# Altium PCB BMW Front-Centet Driver-Passenger Light.PcbDoc
Units mm, origin at the board's own origin, x right, y up, seen from the top; angles counter-clockwise.
Board outline 152.4 x 101.6 mm, 2 copper layers (Top Layer, Bottom Layer); 80 components, 62 nets, 160 pads, 0 vias.
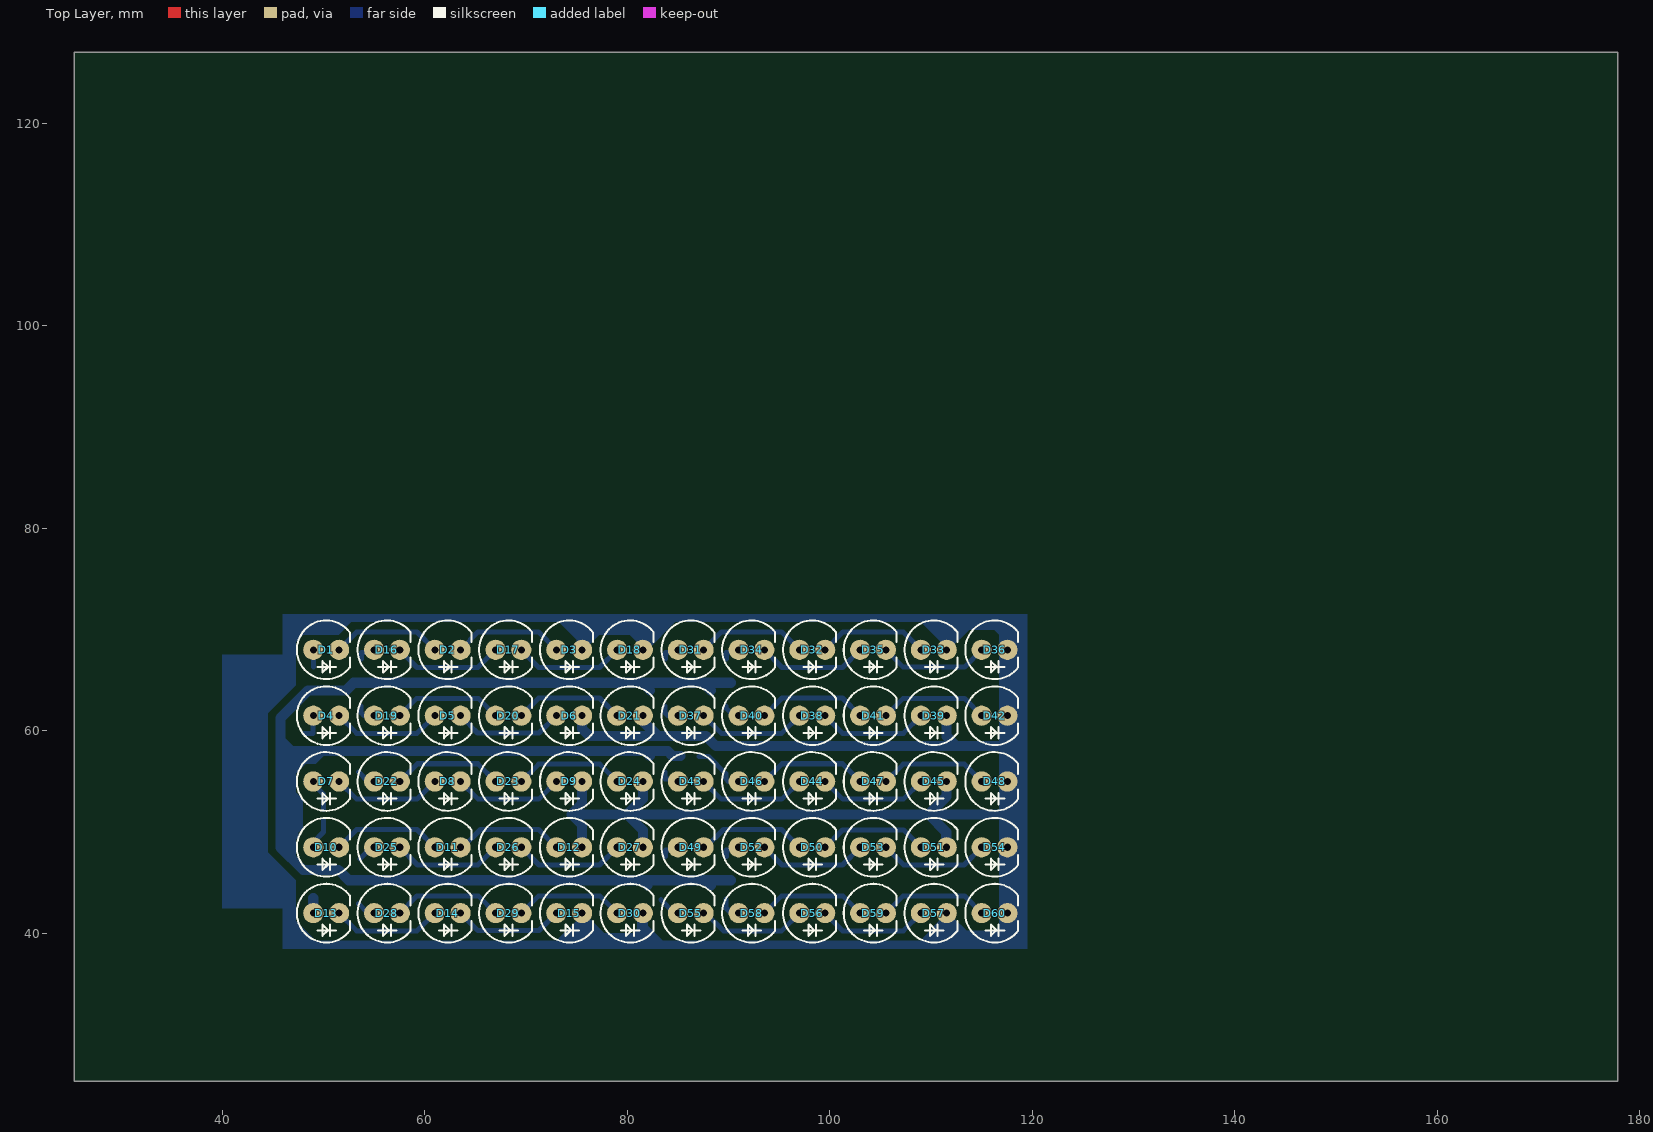
[diagram p0: Top Layer view]
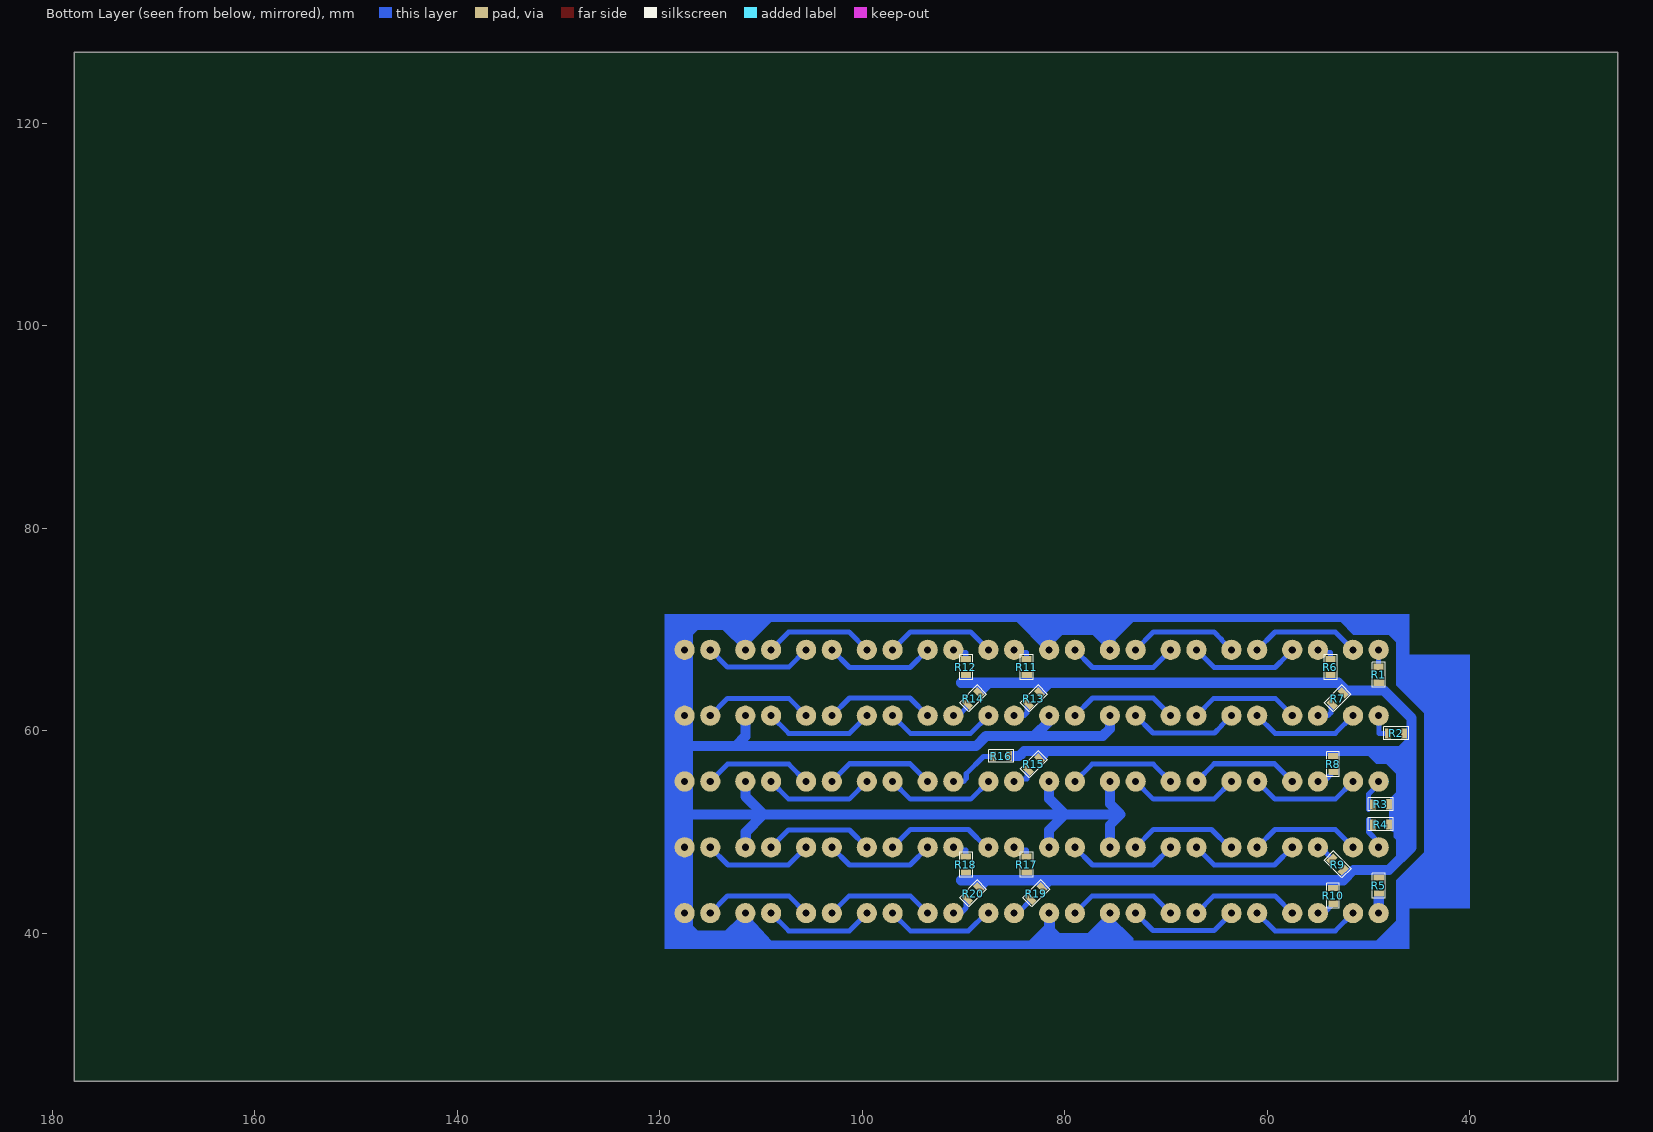
[diagram p1: Bottom Layer view, seen from below]
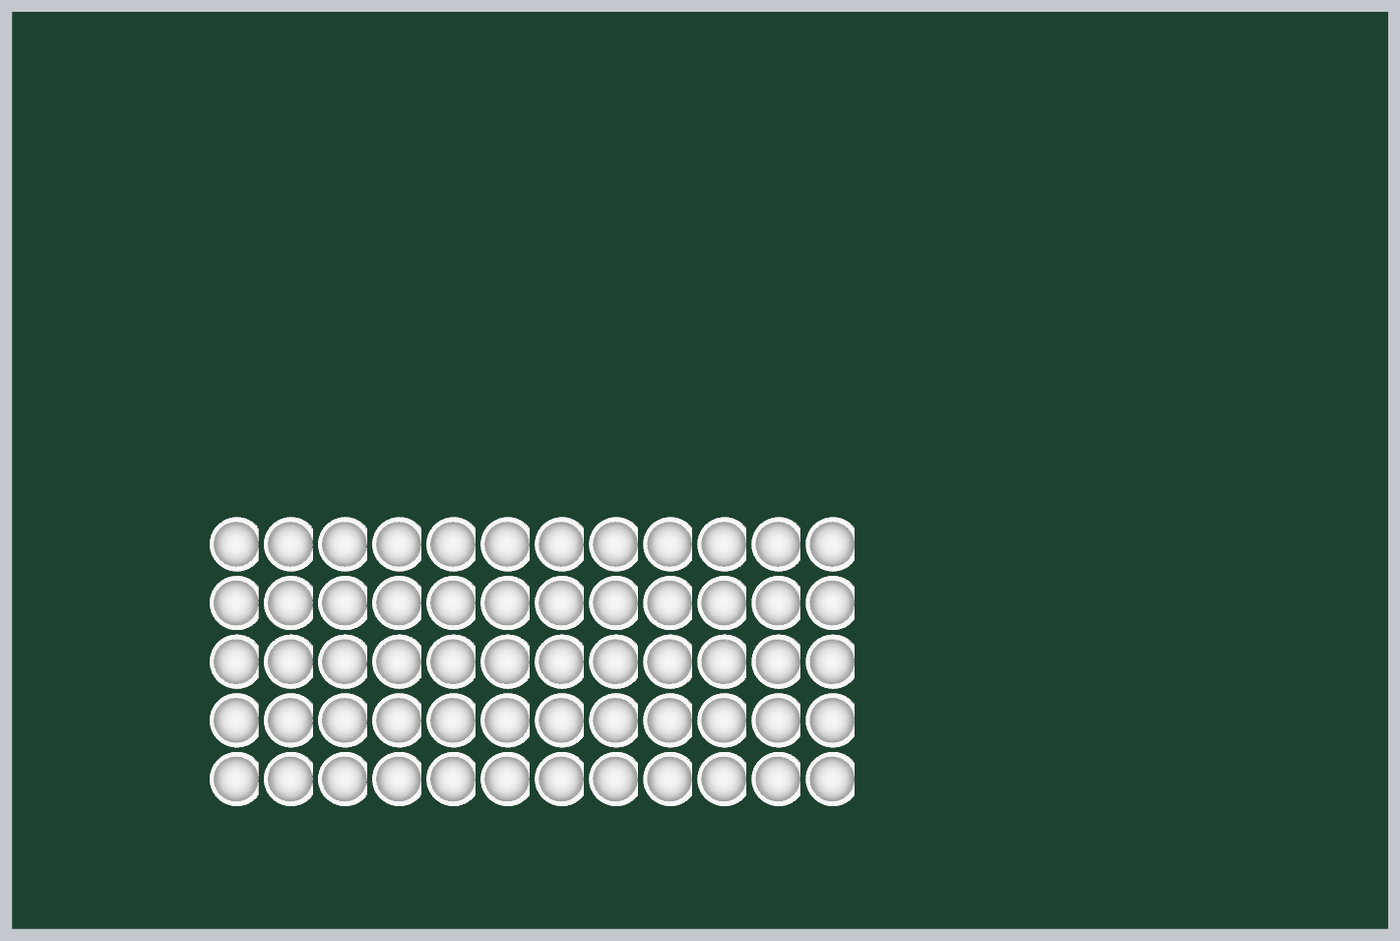
[diagram p2: 3D render of the assembled board from above, using the file's embedded part models]
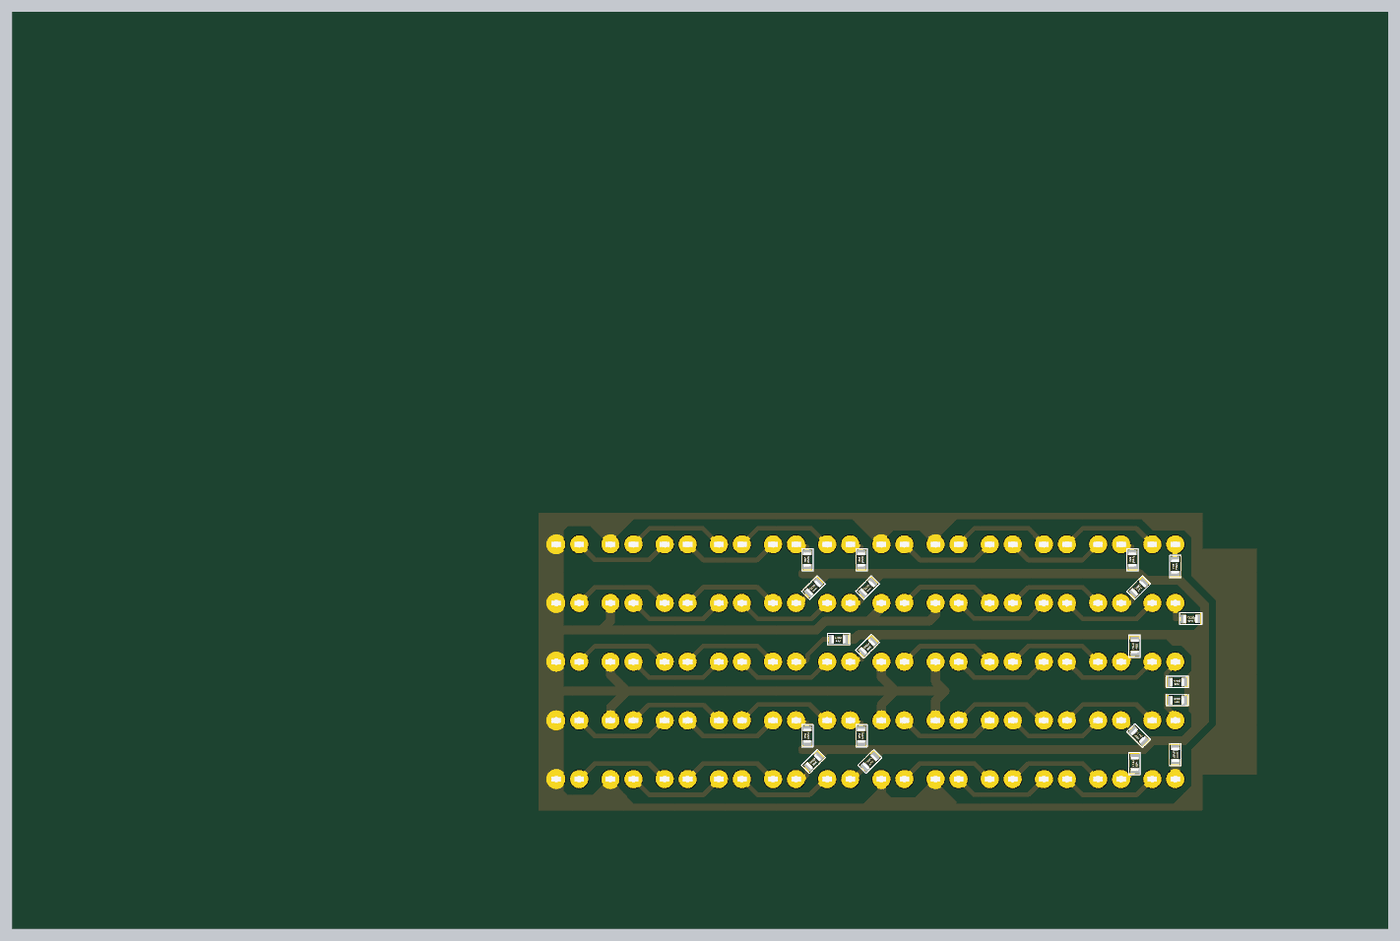
[diagram p3: 3D render of the assembled board from below, using the file's embedded part models]

## Layer stack, top to bottom
Top Solder: solder mask 0.0102, Solder Resist, Dk 3.5
Top Layer: signal copper 0.0356
Dielectric 1: dielectric 0.32, FR-4, Dk 4.8
Bottom Layer: signal copper 0.0356
Bottom Solder: solder mask 0.0102, Solder Resist, Dk 3.5

## Board outline
25.4,25.4 177.8,25.4 177.8,127 25.4,127

## Design rules (kind name [scope] priority, off if disabled: settings)
Clearance [All] p1: gap=0.254
PolygonConnect [All] p1: connectstyle=Relief reliefconductorwidth=0.254 reliefentries=4 polygonreliefangle="90 Angle" airgapwidth=0.254
RoutingVias [All] p1: holewidth=0.711 width=1.27 viastyle="Through Hole" minholewidth=0.711 minwidth=1.27 maxholewidth=0.711 maxwidth=1.27
SolderMaskExpansion [All] p1: expansion=0.102
Width [All] p1: maxlimit=1 minlimit=0.5 preferedwidth=1 minimp=50.000000 maximp=50.000000 favimp=50.000000
29 further rules are at their usual default settings.

## Components (designator, comment, footprint, x,y, rotation, side; value= is the part's Value field where it differs from the comment)
D1 "White" "LED Round 5mm White" 49,68 r0 top
D2 "White" "LED Round 5mm White" 61,68 r0 top
D3 "White" "LED Round 5mm White" 73,68 r0 top
D4 "White" "LED Round 5mm White" 49,61.5 r0 top
D5 "White" "LED Round 5mm White" 61,61.5 r0 top
D6 "White" "LED Round 5mm White" 73,61.5 r0 top
D7 "White" "LED Round 5mm White" 49,55 r0 top
D8 "White" "LED Round 5mm White" 61,55 r0 top
D9 "White" "LED Round 5mm White" 73,55 r0 top
D10 "White" "LED Round 5mm White" 49,48.5 r0 top
D11 "White" "LED Round 5mm White" 61,48.5 r0 top
D12 "White" "LED Round 5mm White" 73,48.5 r0 top
D13 "White" "LED Round 5mm White" 49,42 r0 top
D14 "White" "LED Round 5mm White" 61,42 r0 top
D15 "White" "LED Round 5mm White" 73,42 r0 top
D16 "White" "LED Round 5mm White" 55,68 r0 top
D17 "White" "LED Round 5mm White" 67,68 r0 top
D18 "White" "LED Round 5mm White" 79,68 r0 top
D19 "White" "LED Round 5mm White" 55,61.5 r0 top
D20 "White" "LED Round 5mm White" 67,61.5 r0 top
D21 "White" "LED Round 5mm White" 79,61.5 r0 top
D22 "White" "LED Round 5mm White" 55,55 r0 top
D23 "White" "LED Round 5mm White" 67,55 r0 top
D24 "White" "LED Round 5mm White" 79,55 r0 top
D25 "White" "LED Round 5mm White" 55,48.5 r0 top
D26 "White" "LED Round 5mm White" 67,48.5 r0 top
D27 "White" "LED Round 5mm White" 79,48.5 r0 top
D28 "White" "LED Round 5mm White" 55,42 r0 top
D29 "White" "LED Round 5mm White" 67,42 r0 top
D30 "White" "LED Round 5mm White" 79,42 r0 top
D31 "White" "LED Round 5mm White" 85,68 r0 top
D32 "White" "LED Round 5mm White" 97,68 r0 top
D33 "White" "LED Round 5mm White" 109,68 r0 top
D34 "White" "LED Round 5mm White" 91,68 r0 top
D35 "White" "LED Round 5mm White" 103,68 r0 top
D36 "White" "LED Round 5mm White" 115,68 r0 top
D37 "White" "LED Round 5mm White" 85,61.5 r0 top
D38 "White" "LED Round 5mm White" 97,61.5 r0 top
D39 "White" "LED Round 5mm White" 109,61.5 r0 top
D40 "White" "LED Round 5mm White" 91,61.5 r0 top
D41 "White" "LED Round 5mm White" 103,61.5 r0 top
D42 "White" "LED Round 5mm White" 115,61.5 r0 top
D43 "White" "LED Round 5mm White" 85,55 r0 top
D44 "White" "LED Round 5mm White" 97,55 r0 top
D45 "White" "LED Round 5mm White" 109,55 r0 top
D46 "White" "LED Round 5mm White" 91,55 r0 top
D47 "White" "LED Round 5mm White" 103,55 r0 top
D48 "White" "LED Round 5mm White" 115,55 r0 top
D49 "White" "LED Round 5mm White" 85,48.5 r0 top
D50 "White" "LED Round 5mm White" 97,48.5 r0 top
D51 "White" "LED Round 5mm White" 109,48.5 r0 top
D52 "White" "LED Round 5mm White" 91,48.5 r0 top
D53 "White" "LED Round 5mm White" 103,48.5 r0 top
D54 "White" "LED Round 5mm White" 115,48.5 r0 top
D55 "White" "LED Round 5mm White" 85,42 r0 top
D56 "White" "LED Round 5mm White" 97,42 r0 top
D57 "White" "LED Round 5mm White" 109,42 r0 top
D58 "White" "LED Round 5mm White" 91,42 r0 top
D59 "White" "LED Round 5mm White" 103,42 r0 top
D60 "White" "LED Round 5mm White" 115,42 r0 top
R1 "0 КOm" "SMD 0603 (1608)" 49,64.75 r90 bottom
R2 "0 КOm" "SMD 0603 (1608)" 46.5,59.75 r0 bottom
R3 "0 КOm" "SMD 0603 (1608)" 48,52.75 r0 bottom
R4 "0 КOm" "SMD 0603 (1608)" 48,50.75 r0 bottom
R5 "0 КOm" "SMD 0603 (1608)" 49,45.5 r270 bottom
R6 "0 КOm" "SMD 0603 (1608)" 53.75,65.5 r90 bottom
R7 "0 КOm" "SMD 0603 (1608)" 52.5,63.75 r315 bottom
R8 "0 КOm" "SMD 0603 (1608)" 53.5,57.5 r270 bottom
R9 "0 КOm" "SMD 0603 (1608)" 52.5,46.25 r45 bottom
R10 "0 КOm" "SMD 0603 (1608)" 53.5,44.5 r270 bottom
R11 "0 КOm" "SMD 0603 (1608)" 83.75,65.5 r90 bottom
R12 "0 КOm" "SMD 0603 (1608)" 89.75,65.5 r90 bottom
R13 "0 КOm" "SMD 0603 (1608)" 82.5,63.75 r315 bottom
R14 "0 КOm" "SMD 0603 (1608)" 88.5,63.75 r315 bottom
R15 "0 КOm" "SMD 0603 (1608)" 82.5,57.25 r315 bottom
R16 "0 КOm" "SMD 0603 (1608)" 85.5,57.5 r0 bottom
R17 "0 КOm" "SMD 0603 (1608)" 83.75,46 r90 bottom
R18 "0 КOm" "SMD 0603 (1608)" 89.75,46 r90 bottom
R19 "0 КOm" "SMD 0603 (1608)" 82.25,44.5 r315 bottom
R20 "0 КOm" "SMD 0603 (1608)" 88.5,44.5 r315 bottom

## Footprints (in the part's own frame and the unit in brackets; to place one, negate y for a bottom-side part, rotate by r counter-clockwise, add the part's x,y. Pads: shape width x height; smd on the part's side, far side on the other; paste and mask are expansions set on the pad)
"LED Round 5mm White" [mm]
  round 2 hole 0.7: A(0,0) K(2.54,0)
  silkscreen extent -1.62,-2.9 3.6,2.9, body extent -1.71,-3.01 3.71,3.01, height 9.31
"SMD 0603 (1608)" [mm]
  rect 0.6x1 smd: 1(0,0) 2(1.575,0.025)
  silkscreen extent -0.45,-0.65 2.02,0.63, body extent 0.03,-0.4 1.58,0.45, height 0.45

## Part data
D1 D2 D3 D4 D5 D6 D7 D8 D9 D10 D11 D12 D13 D14 D15 D16 D17 D18 D19 D20 D21 D22 D23 D24 D25 D26 D27 D28 D29 D30 D31 D32 D33 D34 D35 D36 D37 D38 D39 D40 D41 D42 D43 D44 D45 D46 D47 D48 D49 D50 D51 D52 D53 D54 D55 D56 D57 D58 D59 D60: library part "Led Round 5mm White", "3.2-3.4v 25mA, 16-20cd"
R1 R2 R3 R4 R5 R6 R7 R8 R9 R10 R11 R12 R13 R14 R15 R16 R17 R18 R19 R20: library part Resistor

## Nets (pads, with @x,y where several pads share a name; then routed paths per layer and width w, separated by ;. In a path a pad name is that pad's centre, name@x,y a point inside that pad or via, vN(x,y) a via of type N, cw(c..) or ccw(c..) an arc to the next point about the centre after c; other vN are vias at no path point)
+12V: R1.1 R2.1 R3.1 R4.1 R5.1 R6.1 R7.1 R8.1 R9.1 R10.1 R11.1 R12.1 R13.1 R14.1 R15.1 R16.1 R17.1 R18.1 R19.1 R20.1 | length 155.6
  Bottom Layer w1: 46.04,57.25 46.04,54.46 47.5,53 47.5,50.5 ; 46.25,58 81.75,58 82.25,57.5 ; 81.5,58 84,58 84.5,57.5 R16.1@85.25,57.5 ; 82,44.75 81.5,45.25 ; 82.25,64 81.5,64.75 ; 87.75,45.25 88.25,44.75 ; 88.25,64 87.5,64.75 ; 90.25,45.25 81.5,45.25 ; 90.25,64.75 87.5,64.75 ; 81.5,45.25 52.5,45.25 51.5,46.25 48,46.25 45.75,48.5 45.75,61.25 48.5,64 52.25,64 53,64.75 81.5,64.75 ; 81.5,64.75 87.5,64.75
GND: D3.K D6.K D9.K D12.K D15.K D18.K D21.K D24.K D27.K D30.K D33.K D36.K D39.K D42.K D45.K D48.K D51.K D54.K D57.K D60.K | length 116
  Bottom Layer w1: D12.K 75.54,50.71 74.5,51.75 ; D9.K 75.54,52.79 74.5,51.75 ; D6.K 75.54,60.21 76.25,59.5 83,59.5 ; D27.K 81.54,50.21 80,51.75 ; D24.K 81.54,53.29 80,51.75 ; D21.K 81.54,60.96 83,59.5 ; D51.K 111.5,48.46 111.5,50 109.75,51.75 ; D45.K 111.54,53.54 109.75,51.75 ; D39.K 111.54,59.46 112.5,58.5 ; 117,51.75 109.75,51.75 ; D48.K@117.5,55.04 D48.K ; 117.75,58.5 112.5,58.5 ; 74.5,51.75 80,51.75 ; 80,51.75 109.75,51.75 ; 83,59.5 87.75,59.5 88.75,58.5 112.5,58.5
NetD1_A: D1.A R1.2 | length 1.6
  Bottom Layer w0.5: R1.2 D1.A@49.025,67.975
NetD1_K: D1.K D2.A | length 10.9
  Bottom Layer w0.5: D1.K 53.29,69.75 59.25,69.75 D2.A
NetD2_K: D2.K D3.A | length 10.9
  Bottom Layer w0.5: D2.K 64.54,69 64.54,69.04 65.25,69.75 71.25,69.75 D3.A
NetD4_A: D4.A R2.2 | length 2.7
  Bottom Layer w0.5: R2.2 48.975,59.725 48.975,61.475 D4.A
NetD4_K: D4.K D5.A | length 10.9
  Bottom Layer w0.5: D4.K 53.29,59.75 59.25,59.75 D5.A
NetD5_K: D5.K D6.A | length 10.9
  Bottom Layer w0.5: D5.K 64.54,60.5 64.54,60.46 65.21,59.79 71.29,59.79 D6.A
NetD7_A: D7.A R3.2 | length 3.9
  Bottom Layer w0.5: D7.A@48.25,55 D7.A 49,54.75 50,53.75 50,52.25
NetD7_K: D7.K D8.A | length 10.9
  Bottom Layer w0.5: D7.K 53.29,53.25 59.25,53.25 D8.A
NetD8_K: D8.K D9.A | length 10.9
  Bottom Layer w0.5: D8.K 65.29,53.25 71.25,53.25 D9.A
NetD10_A: D10.A R4.2 | length 3.7
  Bottom Layer w0.5: D10.A@48.45,48.5 D10.A 49,49 50,50 50,51.25
NetD10_K: D10.K D11.A | length 10.9
  Bottom Layer w0.5: D10.K 53.29,50.25 59.25,50.25 D11.A
NetD11_K: D11.K D12.A | length 10.9
  Bottom Layer w0.5: D11.K 63.75,48.5 65.5,50.25 71.25,50.25 D12.A
NetD13_A: D13.A R5.2 | length 1.5
  Bottom Layer w1: D13.A 49,43.5
NetD13_K: D13.K D14.A | length 10.9
  Bottom Layer w0.5: D13.K 53.29,40.25 59.25,40.25 D14.A
NetD14_K: D14.K D15.A | length 10.9
  Bottom Layer w0.5: D14.K 65.25,40.29 71.29,40.29 D15.A
NetD16_A: D16.A R6.2 | length 2
  Bottom Layer w0.5: R6.2 53.775,67.725 54.725,67.725 D16.A
NetD16_K: D16.K D17.A | length 10.7
  Bottom Layer w0.5: D16.K@58.04,68 58.04,67.46 59.25,66.25 65.25,66.25 D17.A
NetD17_K: D17.K D18.A | length 10.9
  Bottom Layer w0.5: D17.K@69.52,67.98 71.25,66.25 77.25,66.25 D18.A
NetD19_A: D19.A R7.2 | length 2
  Bottom Layer w0.5: R7.2@53.725,62.425 53.725,61.775 54,61.5 D19.A
NetD19_K: D19.K D20.A | length 10.7
  Bottom Layer w0.5: D19.K@58.04,61.5 58.04,62.04 59.21,63.21 65.29,63.21 D20.A
NetD20_K: D20.K D21.A | length 10.9
  Bottom Layer w0.5: D20.K@69.52,61.52 71.25,63.25 77.25,63.25 D21.A
NetD22_A: D22.A R8.2 | length 1.9
  Bottom Layer w0.5: R8.2 54.4,55 D22.A
NetD22_K: D22.K D23.A | length 10.9
  Bottom Layer w0.5: D22.K 59.29,56.75 65.25,56.75 D23.A
NetD23_K: D23.K D24.A | length 10.9
  Bottom Layer w0.5: D23.K 71.25,56.71 77.29,56.71 D24.A
NetD25_A: D25.A R9.2 | length 2.1
  Bottom Layer w0.5: R9.2@53.614,47.364 54.25,48 54.25,48.5 D25.A
NetD25_K: D25.K D26.A | length 10.9
  Bottom Layer w0.5: D25.K 59.29,46.75 65.25,46.75 D26.A
NetD26_K: D26.K D27.A | length 10.9
  Bottom Layer w0.5: D26.K 71.29,46.75 77.25,46.75 D27.A
NetD28_A: D28.A R10.2 | length 1.9
  Bottom Layer w0.5: R10.2 54.4,42 D28.A
NetD28_K: D28.K D29.A | length 10.9
  Bottom Layer w0.5: D28.K 59.25,43.71 65.29,43.71 D29.A
NetD29_K: D29.K D30.A | length 10.9
  Bottom Layer w0.5: D29.K 71.25,43.71 77.29,43.71 D30.A
NetD31_A: D31.A R11.2 | length 2
  Bottom Layer w0.5: R11.2 83.775,67.725 84.725,67.725 D31.A
NetD31_K: D31.K D32.A | length 10.9
  Bottom Layer w0.5: D31.K 89.29,69.75 95.25,69.75 D32.A
NetD32_K: D32.K D33.A | length 10.9
  Bottom Layer w0.5: D32.K 101.29,69.75 107.25,69.75 D33.A
NetD34_A: D34.A R12.2 | length 2
  Bottom Layer w0.5: R12.2 89.775,67.725 90.725,67.725 D34.A
NetD34_K: D34.K D35.A | length 10.9
  Bottom Layer w0.5: D34.K 95.29,66.25 101.25,66.25 D35.A
NetD35_K: D35.K D36.A | length 10.9
  Bottom Layer w0.5: D35.K 107.25,66.29 113.29,66.29 D36.A
NetD37_A: D37.A R13.2 | length 2
  Bottom Layer w0.5: R13.2@83.725,62.425 83.725,61.775 84,61.5 D37.A
NetD37_K: D37.K D38.A | length 10.9
  Bottom Layer w0.5: D37.K 89.29,59.75 95.25,59.75 D38.A
  Bottom Layer w1: D37.K@87.54,61.46 D37.K
NetD38_K: D38.K D39.A | length 10.9
  Bottom Layer w0.5: D38.K 99.54,61.46 101.25,59.75 107.25,59.75 D39.A
NetD40_A: D40.A R14.2 | length 1.7
  Bottom Layer w0.5: R14.2@89.725,62.425 89.725,62.275 90.5,61.5 D40.A
NetD40_K: D40.K D41.A | length 10.9
  Bottom Layer w0.5: D40.K 95.29,63.25 101.25,63.25 D41.A
NetD41_K: D41.K D42.A | length 10.9
  Bottom Layer w0.5: D41.K 107.25,63.21 113.29,63.21 D42.A
NetD43_A: D43.A R15.2 | length 2
  Bottom Layer w0.5: R15.2@83.725,55.925 83.725,55.275 83.75,55.25 84.75,55.25 D43.A
NetD43_K: D43.K D44.A | length 10.9
  Bottom Layer w0.5: D43.K 89.29,53.25 95.25,53.25 D44.A
NetD44_K: D44.K D45.A | length 10.9
  Bottom Layer w0.5: D44.K 101.29,53.25 107.25,53.25 D45.A
NetD46_A: D46.A R16.2 | length 5.2
  Bottom Layer w0.5: R16.2 88.025,57.475 89.725,55.775 89.725,55.275 90,55 D46.A
NetD46_K: D46.K D47.A | length 10.9
  Bottom Layer w0.5: D46.K 95.29,56.75 101.25,56.75 D47.A
NetD47_K: D47.K D48.A | length 10.9
  Bottom Layer w0.5: D47.K 107.25,56.71 113.29,56.71 D48.A
NetD49_A: D49.A R17.2 | length 2
  Bottom Layer w0.5: R17.2 83.775,48.225 84.725,48.225 D49.A
NetD49_K: D49.K D50.A | length 10.9
  Bottom Layer w0.5: D49.K 87.75,48.5 89.5,50.25 95.25,50.25 D50.A
NetD50_K: D50.K D51.A | length 10.9
  Bottom Layer w0.5: D50.K 101.25,50.21 107.29,50.21 D51.A
NetD52_A: D52.A R18.2 | length 2
  Bottom Layer w0.5: R18.2 89.775,48.225 90.725,48.225 D52.A
NetD52_K: D52.K D53.A | length 10.9
  Bottom Layer w0.5: D52.K 95.29,46.75 101.25,46.75 D53.A
NetD53_K: D53.K D54.A | length 10.9
  Bottom Layer w0.5: D53.K 107.29,46.75 113.25,46.75 D54.A
NetD55_A: D55.A R19.2 | length 2.2
  Bottom Layer w0.5: R19.2@83.314,43.336 84.65,42 D55.A
NetD55_K: D55.K D56.A | length 10.9
  Bottom Layer w0.5: D55.K 87.75,42 89.5,40.25 95.25,40.25 D56.A
NetD56_K: D56.K D57.A | length 10.9
  Bottom Layer w0.5: D56.K 99.54,41.96 101.25,40.25 107.25,40.25 D57.A
NetD58_A: D58.A R20.2 | length 2.4
  Bottom Layer w0.5: 89.725,42.925 89.75,42.9 ; R20.2@89.75,43.368 89.75,42.5 90.25,42 D58.A
NetD58_K: D58.K D59.A | length 10.9
  Bottom Layer w0.5: D58.K 95.25,43.71 101.29,43.71 D59.A
NetD59_K: D59.K D60.A | length 10.9
  Bottom Layer w0.5: D59.K 107.25,43.71 113.29,43.71 D60.A

## Other copper
Bottom Layer:
  region net +12V: 46.25,59.25 47,58.5 49,58.5 50,57.5 49.25,56.75 48.25,56.75 47.25,55.75 47.25,53.75 46,53.75 45.75,54 45.75,59.25
  region net +12V: 46.25,54.25 46.25,54 47.5,52.75 47.5,49.5 47.25,49.25 47.25,47 45.75,48.5 45.75,54.25
  region net GND: 50.5,39.25 50.5,38.5 46,38.5 46,42.5 40,42.5 40,67.5 46,67.5 46,71.488 52.738,71.488 52.75,71.5 52.751,71.499 52.751,70.751 51.5,69.5 48,69.5 47.25,68.75 47.25,64.5 44.5,61.75 44.5,48 47.25,45.25 47.25,41.25 49.25,39.25
  region net GND: 52.75,71.5 119.5,71.5 119.5,38.5 50.5,38.5 50.5,39.25 73.25,39.25 73.25,39.5 75.54,41.79 75.54,42 75.75,42 77.75,40 80.5,40 81,40.5 81,41.75 81.417,41.75 81.667,42 82,41.667 82,40.75 83.5,39.25 109,39.25 111,41.5 111.54,42 112.04,41.5 112.25,41.5 113.5,40.25 116.25,40.25 116.25,40.252 116.75,40.752 116.75,69.5 116.25,70 113.75,70 111.75,68 111.54,68 111.54,68.21 109,70.75 84.75,70.75 82,68 81.54,68 81.54,68.21 80.25,69.5 77.25,69.5 75.75,68 75.54,68 75,68.54 75,69 73.249,70.751 52.751,70.751 52.751,71.499